# Altium PCB PCB1.PcbDoc
Units mil, origin at the board's own origin, x right, y up, seen from the top; angles counter-clockwise.
Board outline 4672 x 1859 mil, 2 copper layers (Top Layer, Bottom Layer); 85 components, 54 nets, 248 pads, 55 vias.
Unrouted connection lines stored in the file: 3.
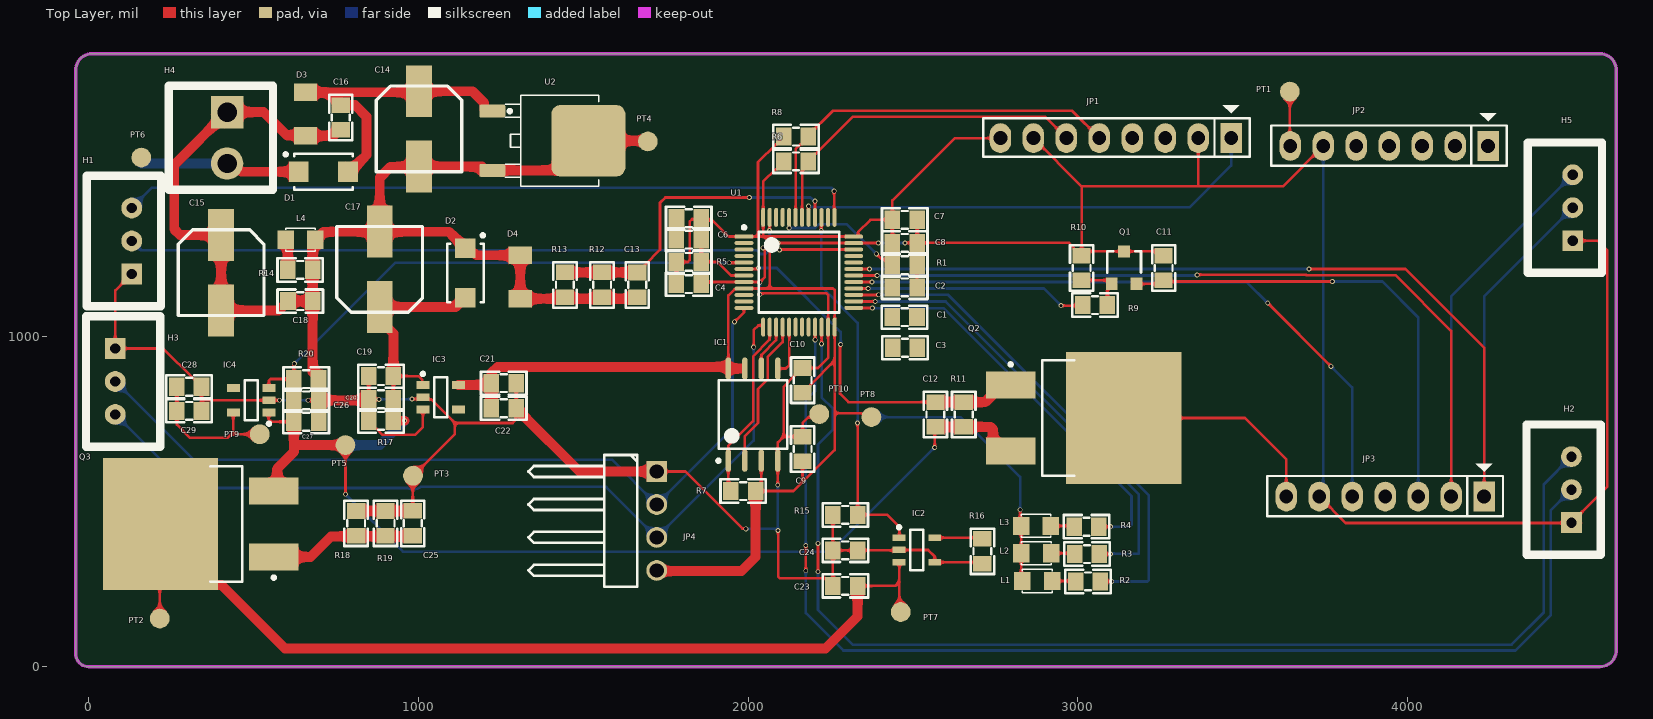
[diagram p0: Top Layer view]
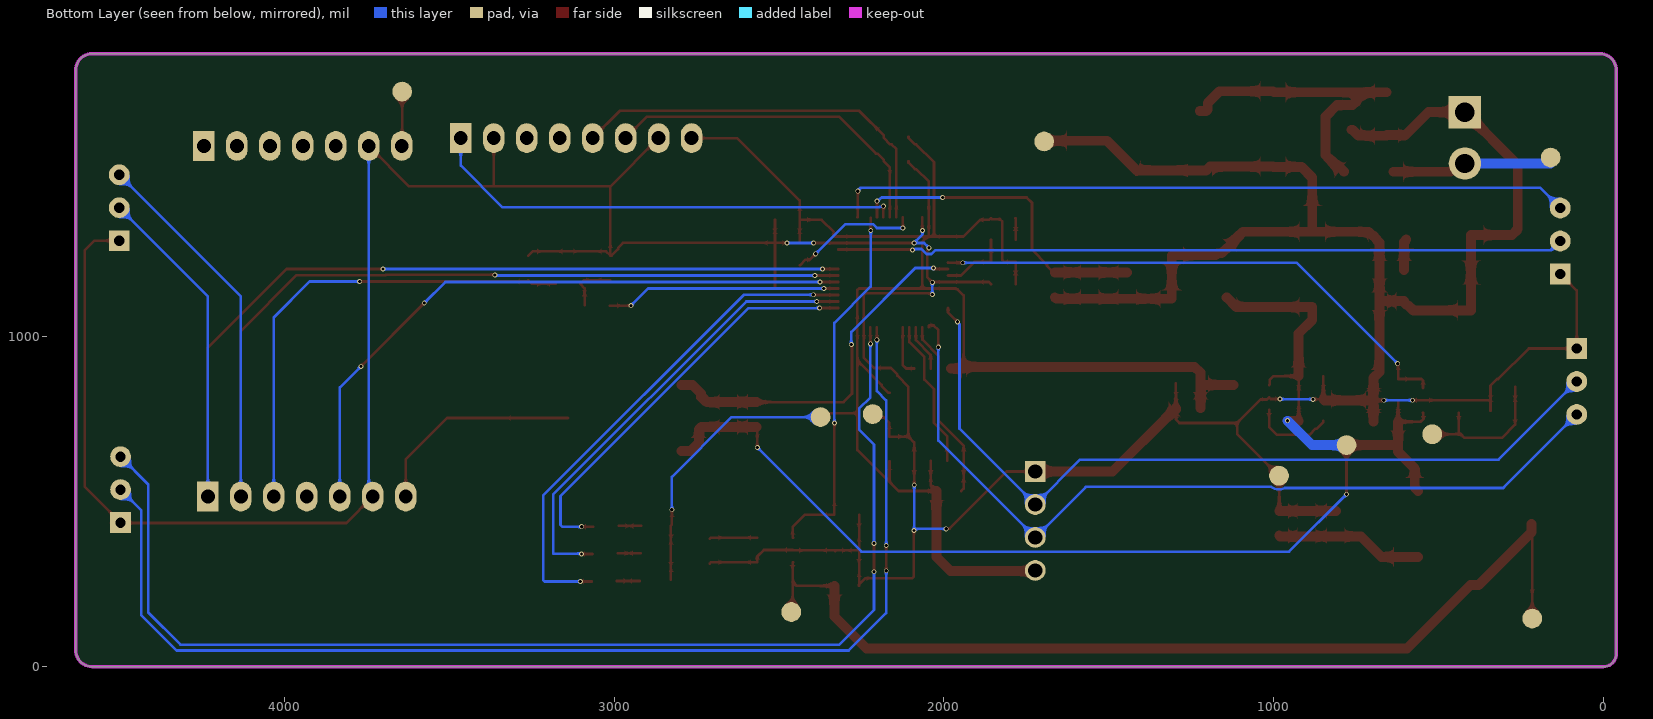
[diagram p1: Bottom Layer view, seen from below]
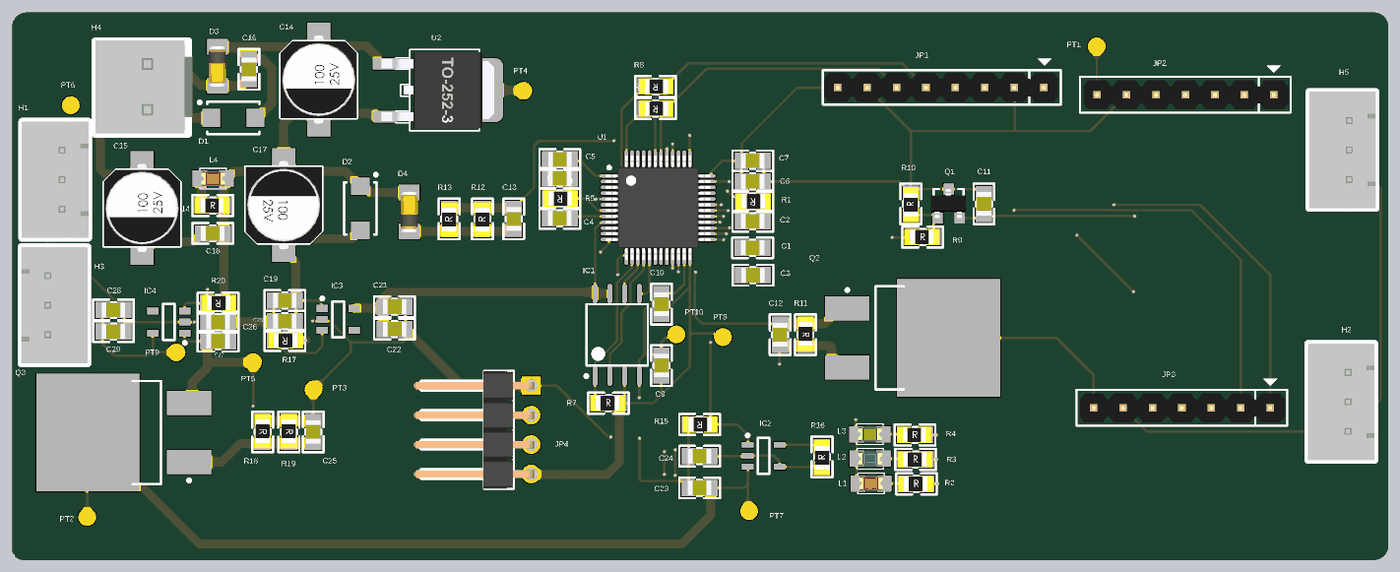
[diagram p2: 3D render of the assembled board from above, using the file's embedded part models]

## Layer stack, top to bottom
Top Solder: solder mask 0.4, Solder Resist, Dk 3.5
Top Layer: signal copper 1.4
Dielectric 1: dielectric 12.6, FR-4, Dk 4.8
Bottom Layer: signal copper 1.4
Bottom Solder: solder mask 0.4, Solder Resist, Dk 3.5

## Board outline
0,0 cw(c0,39) -39,39 -39,1809 cw(c11,1809) 11,1859 4583,1859 cw(c4583,1809) 4633,1809 4633,50 cw(c4583,50) 4583,0

## Design rules (kind name [scope] priority, off if disabled: settings)
Clearance [All] p1: gap=7 ignorepadtopadclearanceinfootprint=FALSE
PolygonConnect [All] p1: connectstyle=Relief reliefconductorwidth=10 reliefentries=4 polygonreliefangle="90 Angle" airgapwidth=10
RoutingVias [All] p1: holewidth=28 width=50 viastyle="Through Hole" minholewidth=10 minwidth=15 maxholewidth=20 maxwidth=30
SolderMaskExpansion via [IsVia] p1: expansion=4 istentingtop=TRUE
SolderMaskExpansion [All] p2: expansion=4 istentingtop=FALSE
Width [All] p1: maxlimit=50 minlimit=8 preferedwidth=30
30 further rules are at their usual default settings.

## Classes and differential pairs
component class LTE,GPS: C11 C12 JP2 JP3 JP4 PT1 Q1 Q2 R9 R10 R11
component class MCU: C1 C2 C3 C4 C5 C6 C7 C8 C9 C10 IC1 JP1 L1 L2 L3 R1 R2 R3 R4 R5 R6 R7 R8 U1
component class "PSU - BUCK, LDO, CHARGER": C13 C14 C15 C16 C17 C18 C19 C20 C21 C22 C25 C26 C27 C28 C29 D1 D2 D3 D4 H1 H2 H3 H4 H5 IC3 IC4 L4 PT2 PT3 PT4 PT5 PT6 PT7 PT8 PT9 PT10 Q3 R12 R13 R14 R17 R18 R19 R20 U2

## Components (designator, comment, footprint, x,y, rotation, side; value= is the part's Value field where it differs from the comment)
C1 "104" "tu 0805" 2475,1060 r180 top
C2 "104" "tu 0805" 2475.23,1150.13 r180 top
C3 "104" "tu 0805" 2476,967 r180 top
C4 "104" "tu 0805" 1820.23,1160.13 r180 top
C5 "104" "tu 0805" 1820.23,1360.13 r0 top
C6 "33pF" "tu 0805" 1820.23,1295.13 r180 top
C7 "104" "tu 0805" 2475.23,1355.13 r180 top
C8 "104" "tu 0805" 2475.23,1285.13 r180 top
C9 "33pF" "tu 0805" 2165.23,660.13 r90 top
C10 "104" "tu 0805" 2165.23,868.72 r270 top
C11 "104" "tu 0805" 3260.23,1209.16 r270 top
C12 "104" "tu 0805" 2568.23,765.07 r270 top
C13 "104" "tu 0805" 1664,1158.13 r270 top
C14 "100uF" "tu nhom 6.3 (d)" 1002,1630.93 r270 top
C15 "100uF" "tu nhom 6.3 (d)" 402,1195 r270 top
C16 "104" "tu 0805" 765,1666 r270 top
C17 "100uF" "tu nhom 6.3 (d)" 883,1205 r90 top
C18 "104" "tu 0805" 642,1109 r0 top
C19 "4.7uF" "tu 0805" 887,881 r180 top
C20 "104" "tu 0805" 887,811 r180 top
C21 "104" "tu 0805" 1259,860 r0 top
C22 "4.7uF" "tu 0805" 1259,784 r0 top
C23 "4.7uF" "tu 0805" 2295,245 r180 top
C24 "4.7uF" "tu 0805" 2295,352.5 r180 top
C25 "104" "tu 0805" 983,434.9 r90 top
C26 "4.7uF" "tu 0805" 660,808 r0 top
C27 "104" "tu 0805" 660,743 r0 top
C28 "104" "tu 0805" 305,849 r0 top
C29 "4.7uF" "tu 0805" 305,776 r0 top
D1 "1N4007" SODFL504X243-2N 712,1501 r0 top
D2 "1N4007" SODFL504X243-2N 1143,1194 r270 top
D3 "12V" "DIODE ZENNER SMD SOD80" 658,1676 r270 top
D4 "5.1V" "DIODE ZENNER SMD SOD80" 1309,1181.72 r90 top
H1 "Header Nạp" XH2.54M-3 131,1191 r90 top
H2 "Header LOG" XH2.54M-3 4497,437 r90 top
H3 "Header GPS" XH2.54M-3 81,965 r270 top
H4 "Header 2P" VH3.96M-2 420,1604 r270 top
H5 "Header LTE" XH2.54M-3 4501,1292 r90 top
IC1 "25Q16BVSIG" SOP127P790X195-8N 2015.23,764.43 r90 top
IC2 "SE9016" SOT95P280X110-5N 2512,354 r0 top
IC3 "TLV70233DBVR" SOT95P280X145-5N 1068,817 r0 top
IC4 "TLV70233DBVR" SOT95P280X145-5N 493,808 r180 top
JP1 "JP8 PIN" JP8 3465.23,1603.13 r180 top value=JP7
JP2 "JP7 PIN" JP7 4244.23,1579.13 r180 top value=JP7
JP3 "JP7 PIN" JP7 4232.21,516.13 r180 top value=JP7
JP4 "JP 1x4 2.54" "JP 1x4 DC" 1623,242 r270 top
L1 "LED 0805" LED-0805-Red 2832,260 r0 top
L2 "LED 0805" LED-0805-Blue 2829,343.94 r0 top
L3 "LED 0805" LED-0805-Green 2828,427 r0 top
L4 "LED 0805" LED-0805-Red 598.06,1295 r0 top
PT1 "PT" "Test pont" 3643,1744 r0 top
PT2 "BAT_IN+" "Test pont" 216,146 r0 top
PT3 "BAT_IN-" "Test pont" 984,579 r0 top
PT4 "PT" "Test pont" 1696,1593 r90 top
PT5 "PT" "Test pont" 779,672 r90 top
PT6 "PT" "Test pont" 160,1544 r90 top
PT7 "PT" "Test pont" 2463,166 r90 top
PT8 "PT" "Test pont" 2374,757 r90 top
PT9 "PT" "Test pont" 519,705 r90 top
PT10 "PT" "Test pont" 2216,766 r90 top
Q1 "HF" SOT23 3140.29,1210.18 r0 top value=C9014
Q2 "IRF9540 DIP" DPAK254P1511X469-3N 2996.23,754.13 r0 top
Q3 "IRF9540 DIP" DPAK254P1511X469-3N 361.77,432.87 r180 top
R1 "10k" "tro smd 0805" 2475.33,1215.13 r180 top
R2 "1k" "tro smd 0805" 3031,261 r0 top
R3 "1k" "tro smd 0805" 3028,344 r0 top
R4 "1k" "tro smd 0805" 3026,427 r0 top
R5 "10k" "tro smd 0805" 1820.33,1225.13 r180 top
R6 "4.7k" "tro smd 0805" 2145.23,1530.13 r180 top
R7 "10k" "tro smd 0805" 1985.23,535.13 r0 top
R8 "4.7k" "tro smd 0805" 2145.23,1605.13 r180 top
R9 "4.7k" "tro smd 0805" 3052,1099 r0 top
R10 "10k" "tro smd 0805" 3009.23,1209.26 r90 top
R11 "220k" "tro smd 0805" 2656.59,764.97 r270 top
R12 "220k" "tro smd 0805" 1555,1158.03 r90 top
R13 "220k" "tro smd 0805" 1442,1158.03 r90 top
R14 "1k" "tro smd 0805" 641.9,1205.97 r0 top
R15 "10k" "tro smd 0805" 2294.9,458 r180 top
R16 "10k" "tro smd 0805" 2708,350 r90 top
R17 "10k" "tro smd 0805" 886.9,743 r180 top
R18 "1k" "tro smd 0805" 814,435 r270 top
R19 "10k" "tro smd 0805" 903,435 r270 top
R20 "10k" "tro smd 0805" 660.1,870 r180 top
U1 "STM32F103xx_LQFP48" STM32_LQPF48 2154.11,1196.25 r0 top
U2 "78M05 SMD TO252" TO252 1370,1595 r270 top

## Footprints (in the part's own frame and the unit in brackets; to place one, negate y for a bottom-side part, rotate by r counter-clockwise, add the part's x,y. Pads: shape width x height; smd on the part's side, far side on the other; paste and mask are expansions set on the pad)
"DIODE ZENNER SMD SOD80" [mm] "SOD80"
  rect 1.35x1.8 smd: 1(1.675,0) 2(-1.675,0)
  body extent -1.75,-0.76 1.75,0.74, height 1.45
DPAK254P1511X469-3N [mm] "D2-PAK, 3-Pads, Body 7.51x8.63mm (max), IPC Medium Density"
  rect 3.81x2.08 smd: 1(-5.08,2.54) 3(-5.08,-2.54)
  rect 8.89x10.16 smd: 2(3.65,0)
  silkscreen extent -5.2,-4.44 -0.2,4.44, body extent -2.65,-5.28 6.16,5.28, height 4.69
JP7 [mil] "JP7"
  rect 65x90 hole 42: 1(0,0)
  oval 65x90 hole 42: 2(100,0) 3(200,0) 4(300,0) 5(400,0) 6(500,0) 7(600,0)
  silkscreen extent -57,-100 658,60, body extent -50,-49 646,49, height 323
JP8 [mil] "JP8"
  rect 65x90 hole 42: 1(0,0)
  oval 65x90 hole 42: 2(100,0) 3(200,0) 4(300,0) 5(400,0) 6(500,0) 7(600,0) 8(700,0)
  silkscreen extent -56,-100 752,57, body extent -48,-50 748,48, height 323
"JP 1x4 DC" [mm] "4 pins, 1 row, right angled, gold plating"
  rect 1.6x1.6 hole 1.1: 1(-8.89,2.54)
  round 1.6 hole 1.1: 2(-6.35,2.54) 3(-3.81,2.54) 4(-1.27,2.54)
  silkscreen extent -10.16,-7.34 0,1.04, body extent -10.16,-7.57 0,2.79, height 2.54
LED-0805-Blue [mil]
  rect 50x55 smd: 1(0,0) 2(90,0)
  silkscreen extent 0,-35 90,35, body extent 5,-25 85,25, height 43
LED-0805-Green [mil]
  rect 50x55 smd: 1(0,0) 2(90,0)
  silkscreen extent 0,-35 90,35, body extent 5,-25 85,25, height 43
LED-0805-Red [mil]
  rect 50x55 smd: 1(0,0) 2(90,0)
  silkscreen extent 0,-35 90,35, body extent 5,-25 85,25, height 43
SODFL504X243-2N [mm] "SODFL, 2-Leads, Body 2.67x5.04mm, IPC Medium Density"
  rect 1.524x1.575 smd: 1(-1.9,0) 2(1.9,0)
  silkscreen extent -3.02,-1.4 2.25,1.46, body extent -2.25,-1.4 2.25,1.4, height 2.43
SOP127P790X195-8N [mm] "SOP, 8-Leads, Body 5.28x5.28mm, Pitch 1.27mm, IPC Medium Density"
  oval 1.7x0.42 smd: 1(-3.55,1.905) 2(-3.55,0.635) 3(-3.55,-0.635) 4(-3.55,-1.905) 5(3.55,-1.905) 6(3.55,-0.635) 7(3.55,0.635) 8(3.55,1.905)
  silkscreen extent -3.67,-2.64 2.64,2.79, body extent -2.7,-2.7 2.7,2.7, height 1.95
SOT23 [mm] "SOT23"
  rect 0.9x0.95 smd: 1(-0.95,-1.25) 2(0,1.25)
  rect 0.9x0.95 smd mask+0: 3(0.95,-1.25)
  silkscreen extent -1.3,-0.38 1.3,1.25, body extent -1.52,-1.23 1.48,1.27, height 1.06
SOT95P280X110-5N [mm] "SOT23, 5-Leads, Body 2.93x2.80mm, Pitch 0.95mm, IPC Medium Density"
  rect 1x0.5 smd: 1(-1.375,0.95) 2(-1.375,0) 3(-1.375,-0.95) 4(1.375,-0.95) 5(1.375,0.95)
  silkscreen extent -1.5,-1.55 0.5,1.87, body extent -0.88,-1.52 0.87,1.53, height 1.1
SOT95P280X145-5N [mm] "SOT23, 5-Leads, Body 2.90x2.80mm, Pitch 0.95mm, IPC Medium Density"
  rect 1x0.6 smd: 1(-1.375,0.95) 2(-1.375,0) 3(-1.375,-0.95) 4(1.375,-0.95) 5(1.375,0.95)
  silkscreen extent -1.5,-1.55 0.5,1.92, body extent -0.88,-1.52 0.87,1.53, height 1.45
STM32_LQPF48 [mm]
  oval 1.45x0.3 smd: 1(-4.225,2.75) 2(-4.225,2.25) 3(-4.225,1.75) 4(-4.225,1.25) 5(-4.225,0.75) 6(-4.225,0.25) 7(-4.225,-0.25) 8(-4.225,-0.75) 9(-4.225,-1.25) 10(-4.225,-1.75) 11(-4.225,-2.25) 12(-4.225,-2.75) 25(4.225,-2.75) 26(4.225,-2.25) 27(4.225,-1.75) 28(4.225,-1.25) 29(4.225,-0.75) 30(4.225,-0.25) 31(4.225,0.25) 32(4.225,0.75) 33(4.225,1.25) 34(4.225,1.75) 35(4.225,2.25) 36(4.225,2.75)
  oval 0.3x1.45 smd: 13(-2.75,-4.225) 14(-2.25,-4.225) 15(-1.75,-4.225) 16(-1.25,-4.225) 17(-0.75,-4.225) 18(-0.25,-4.225) 19(0.25,-4.225) 20(0.75,-4.225) 21(1.25,-4.225) 22(1.75,-4.225) 23(2.25,-4.225) 24(2.75,-4.225) 37(2.75,4.225) 38(2.25,4.225) 39(1.75,4.225) 40(1.25,4.225) 41(0.75,4.225) 42(0.25,4.225) 43(-0.25,4.225) 44(-0.75,4.225) 45(-1.25,4.225) 46(-1.75,4.225) 47(-2.25,4.225) 48(-2.75,4.225)
  silkscreen extent -4.35,-3.1 3.1,3.57, body extent -4.5,-4.5 4.5,4.5, height 1.6
"Test pont" [mil]
  round 60 all layers, no hole: 1(0,0)
TO252 [mm] "TO252"
  round 0.5 on Mech15: 0(0,0)
  rrect25% 1x2 smd: 1(-2.285,-3.7) 3(2.285,-3.7)
  rrect25% 5.5x5.7 smd: 2(0,3.7)
  silkscreen extent -3.5,-2.7 3.5,4.5, body extent -3.3,-3.95 3.3,5.76, height 2.31
"tro smd 0805" [mm]
  rect 1.2x1.4 smd: 1(-0.946,-0.061) 2(0.954,-0.061)
  silkscreen extent -1.75,-0.97 1.75,0.84, body extent -1.56,-0.76 1.44,0.64, height 0.53
"tu 0805" [mm] "Compoment SMD 80x50mil"
  rect 1.2x1.4 smd: 1(-0.946,-0.003) 2(0.954,-0.003)
  silkscreen extent -1.75,-0.89 1.75,0.89, body extent -1.01,-0.64 1.01,0.63, height 0.61
"tu nhom 6.3 (d)" [mm]
  rect 4x2 smd: 1(-2.9,0) 2(2.9,0)
  silkscreen extent -3.3,-3.3 3.3,3.3, body extent -3.8,-3.3 3.8,3.3, height 8
VH3.96M-2 [mm]
  rect 2.5x2.5 hole 1.5: 1(-1.98,0)
  round 2.5 hole 1.5: 2(1.98,0)
  silkscreen extent -4,-4.5 4,3.54, body extent -4.08,-4.49 3.96,3.88, height 10.26
XH2.54M-3 [mm]
  rect 1.6x1.6 hole 0.8: 1(0,0)
  round 1.6 hole 0.8: 2(2.54,0) 3(5.08,0)
  silkscreen extent -2.48,-2.26 7.56,3.46, body extent -2.48,-2.26 7.56,3.48, height 6.91

## Part data
C1 C2 C3 C4 C5 C7 C8 C10 C11 C12 C13 C16 C18 C20 C21 C25 C27 C28: library part "Tu 0805 104 50V 10%", "Dán", Chung_Loai=Dán, Don_Vi=Con, Ma_Hang=MH004551, So_Chan=2, Ten_Linh_Kien="Tụ 0805 104-100nF 10% 50V"
C6 C9: library part "Tu 0805 33pF 50V 10%", "Dán", Chung_Loai=Dán, Don_Vi=Con, Ma_Hang=MH004563, So_Chan=2, Ten_Linh_Kien="Tụ 0805 33p 10% 50V"
C14 C15 C17: library part "Tu Nhom 100uF 25V", "Dán", Chung_Loai=Dán, Don_Vi=Con, Ma_Hang=MH002222, So_Chan=2, Ten_Linh_Kien="Tụ Nhôm 100uF 25V 6x7MM"
C19 C22 C23 C24 C26 C29: library part "Tu 0805 475 25V 20%", "Dán", Chung_Loai=Dán, Don_Vi=Con, Ma_Hang=MH004276, So_Chan=2, Ten_Linh_Kien="Tụ 0805 475-4.7uF 20% 25V"
D1 D2: library part "Diode 1N4007", "Cắm", Chung_Loai=Cắm, Don_Vi=Con, Ma_Hang=MH001063, Ten_Linh_Kien="Diode 1N4007 1A (DIP)"
D3: library part "Diode Zener 12V", "Dán", Chung_Loai=Dán, Don_Vi=Con, Ma_Hang=MH000945, Ten_Linh_Kien="Diode Zener 1/2W 12V SMD1206 ZMM12"
D4: library part "Diode Zener 5.1V", "Dán", Chung_Loai=Dán, Don_Vi=Con, Ma_Hang=MH002881, Ten_Linh_Kien="Diode Zener 1/2W 5.1V SMD1206 ZMM5.1"
H1 H2 H3 H5: library part "Header 3P 2.54 Duc Thang", "Cắm", Chung_Loai=Cắm, Don_Vi=Con, Ma_Hang=MH001292, Ten_Linh_Kien="Header 3P XH2.54-3P Đực Thẳng"
H4: library part "Header 2P VH3.96 Duc Thang", "Cắm", Chung_Loai=Cắm, Don_Vi=Con, Ma_Hang=MH001283, Ten_Linh_Kien="Header 2P XH2.54-2P Đực Thẳng"
JP1: library part JP8
JP2 JP3: library part JP7
JP4: library part "JP 1x4 2.54 Duc Cong", "Cắm", Chung_Loai=Cắm, Don_Vi=Con, Ma_Hang=MH000904, Ten_Linh_Kien="Jump Đơn Đực 2.54MM 1x40P Cong Đứng"
L1 L4: library part "LED 0805 Do", "Dán", Chung_Loai=Dán, Don_Vi=Con, Ma_Hang=MH000897, Ten_Linh_Kien="LED 0805 Màu Đỏ (Red)"
L2: library part "LED 0805 Xanh Duong", "Dán", Chung_Loai=Dán, Don_Vi=Con, Ma_Hang=MH002327, Ten_Linh_Kien="LED 0805 Màu Xanh Dương (Blue)"
L3: library part "LED 0805 Xanh La", "Dán", Chung_Loai=Dán, Don_Vi=Con, Ma_Hang=MH002326, Ten_Linh_Kien="LED 0805 Màu Xanh Lá (Green)"
PT1 PT2 PT3 PT4 PT5 PT6 PT7 PT8 PT9 PT10: library part "test pont"
Q1: library part "C1815 HF SMD", "NPN transistor"
Q2 Q3: "P-Channel Power MOSFET", ComponentLink1Description="Manufacturer Link", ComponentLink1URL=http://www.irf.com/, ComponentLink2Description=Datasheet, ComponentLink2URL=http://www.irf.com/product-info/datasheets/data/irf9540.pdf, DatasheetVersion=PD-9.421C, LatestRevisionDate=17-Jul-2002, LatestRevisionNote="Re-released for DXP Platform.", Note="Pin 2 is electrically connected to pin 4.", PackageDescription="TO, Thru-Hole, Vertical, Heatsink Mounted; 3 In-Line Leads; Pitch 2.54 mm", PackageReference=TO-220AB, PackageVersion=Feb-1997, Published=8-Jun-2000, Publisher="Altium Limited"
R1 R5 R7 R10 R15 R16 R17 R19 R20: library part "Tro 0805 5% 10k", "Dán", Chung_Loai=Dán, Don_Vi=Con, Ma_Hang=MH005239, So_Chan=2, Ten_Linh_Kien="Trở 0805 5% 10k"
R2 R3 R4: library part "Tro 0805 5% 1k", "Dán", Chung_Loai=Dán, Don_Vi=Con, Ma_Hang=MH005234, So_Chan=2, Ten_Linh_Kien="Trở 0805 5% 1k"
R6 R8 R9: library part "Tro 0805 5% 4.7k", "Dán", Chung_Loai=Dán, Don_Vi=Con, Ma_Hang=MH005307, So_Chan=2, Ten_Linh_Kien="Trở 0805 5% 4.7k"
R11 R12 R13: library part "Tro 0805 5% 220k", "Dán", Chung_Loai=Dán, Don_Vi=Con, Ma_Hang=MH005258, So_Chan=2, Ten_Linh_Kien="Trở 0805 5% 220k"
R14 R18: library part "Tro 0805 1% 1k", "Dán", Chung_Loai=Dán, Don_Vi=Con, Ma_Hang=MH005468, So_Chan=2, Ten_Linh_Kien="Trở 0805 1% 1k"
U2: "Dán", Chung_Loai=Dán, Don_Vi=Con, Ma_Hang=MH001917, Ten_Linh_Kien="78M05 TO252"
U1: ComponentLink1Description="Manufacturer Link", ComponentLink1URL=www.st.com/stm32, ComponentLink2Description=Datasheet, ComponentLink2URL=http://www.st.com/stonline/products/literature/ds/13587.pdf, DatasheetVersion="rev6, Mar-2008", PackageDescription="48-Pin Low-Profile Quad Flat Pack, 7 x 7 mm Body, 0.5 mm Pitch (LQFP48)", PackageReference=LQFP48, PackageVersion=Mar-2008, Published=30-May-2008, Publisher="Altium Limited"

## Via types
v1: diameter 15, hole 10, Top Layer to Bottom Layer, tented both sides, 55 vias

## Nets (pads, with @x,y where several pads share a name; then routed paths per layer and width w, separated by ;. In a path a pad name is that pad's centre, name@x,y a point inside that pad or via, vN(x,y) a via of type N, cw(c..) or ccw(c..) an arc to the next point about the centre after c; other vN are vias at no path point)
+5V_DET: C13.1 R12.2 R13.2 U1.40 | length 992.9
  Top Layer w8: C13.1 1667.8,1195.36 1687.43,1214.98 1687.43,1218.92 1733,1264.5 1733,1407 1749,1423 v1(2004,1423) ; v1(2203,1412) 2203,1362.91 U1.40
  Top Layer w30: R13.2 R12.2 1663.62,1195.61 C13.1
  Bottom Layer w8: v1(2004,1423) 2189,1423 2200,1412 v1(2203,1412)
+VIN: D1.1 H4.2 PT6.1 | length 488
  Top Layer w30: H4.2 438.52,1526.05 463.56,1501 D1.1
  Bottom Layer w30: PT6.1@160,1527 160.95,1526.05 H4.2
AD0: C1.1 C2.1 C3.1 C4.1 C7.1 C8.1 C9.2 C10.1 C11.1 C13.2 C14.2 C15.1 C15.2 C16.2 C17.2 C18.1 C18.2 C19.2 C20.2 C21.2 C22.2 C23.2 C24.1 C24.2 C25.2 C26.2 C27.2 C28.2 C29.2 D2.1 D3.1 D4.1 D4.2 H1.1 H2.1 H3.1 H4.1 H5.1 IC1.4 IC2.2 IC2.4 IC3.2 IC4.2 JP1.2 JP1.7 JP2.6 JP3.6 JP4.1 L4.2 PT3.1 PT4.1 PT10.1 Q1.2 R1.1 R10.2 R12.1 R13.1 R14.2 R15.2 R16.1 R18.1 R19.1 R20.1 U1.8 U1.23 U1.35 U1.47 U2.2 U2.3 | length 15795.8
  Top Layer w8: H1.1 81,1141 H3.1 226.44,965 319.02,872.43 322.95,872.43 342.57,852.8 C28.2 342.57,812.37 ; C29.2 342.57,812.37 ; v1(579,808) IC4.2 346.94,808 342.57,812.37 ; v1(666,808) C26.2@697.33,808 ; C27.2 C26.2 ; C19.2 C20.2 849.56,811 v1(881,811) ; v1(981,812) 1008.87,812 IC3.2 1020.53,810.33 1039.67,810.33 1111,739 ; C25.2 983.13,578.13 PT3.1 1111,706 1111,739 ; C21.2 C22.2 1296,783.29 1296,749 1286,739 1111,739 ; JP4.1 1810,592 1982.86,419.14 1992.17,419.14 v1(1993.3,418) ; C4.1 1863.91,1166.72 U1.8 2034.04,1166.72 v1(2035.23,1165.54) 2050.23,1180.54 2050.23,1263.24 2045.23,1268.24 v1(2045.23,1270.13) ; v1(2035.23,1128.54) 2037.12,1128.54 2040.62,1132.04 2238.01,1132.04 2242.69,1127.35 U1.23 2242.69,936.69 2211.94,905.94 2161.16,905.94 2141.54,886.32 2141.54,882.39 2107.8,848.65 2107.8,697.71 ; v1(2065.23,1323.02) 2065.23,1362.29 U1.47 ; v1(2090,551.24) 2090.23,551.47 IC1.4 2090.23,680.13 2107.8,697.71 ; v1(2090.23,1285.13) 2090.53,1284.83 U1.35 2394.93,1284.83 v1(2395.23,1285.13) ; v1(2091,413) 2091,273.38 2095.69,268.69 2237.8,268.69 2257.43,249.07 C23.2 ; PT10.1 2206.3,756.3 2182.3,756.3 2165.36,739.36 C9.2 2107.8,697.71 ; C23.2@2257.32,245.24 R15.2 ; C24.2 2327.47,352.63 2329.85,350.25 C24.1 2456.5,352.63 IC2.2 2546,354 2566.13,333.87 IC2.4 2706.57,316.6 R16.1 ; v1(2475.78,1285.13) 2475.91,1285.27 C8.1 ; C2.1 2512.46,1217.53 C8.1 ; C7.1 C8.1 ; JP1.7 3011.62,1456.74 ; R10.2@3007.68,1246.83 2988.06,1266.46 2988.06,1270.39 2973.19,1285.27 C8.1 ; C11.1 3247.09,1259.39 Q1.2 3024.18,1259.39 R10.2 3011.62,1456.74 ; 3365.23,1459.97 JP1.2 ; JP3.6 3812.34,436 H2.1@4526,436 ; JP2.6 3621.83,1456.74 3365.23,1456.74 3011.62,1456.74 ; H2.1 4606,546 4606,1262 4576,1292 H5.1
  Top Layer w30: C27.2 697.33,743.11 697.33,808 R20.1 697.33,876.33 679.57,894.09 C18.2 ; C26.2 846.16,807.87 C20.2 ; C16.2 760.93,1628.43 742.56,1610.06 D3.1 656.06,1612 600,1612 530.05,1681.95 H4.1 260,1521.95 260,1326.75 277.57,1309.17 C15.1 C15.2 576.73,1080.83 592.21,1096.31 596.15,1096.31 604.77,1104.93 C18.1 C18.2 ; R18.1 811.85,472.47 C25.2 ; C22.2 1296.57,779.93 1305.2,771.31 1309.13,771.31 1488.44,592 JP4.1 ; C13.2 1659.08,1115.77 D4.2 D4.1 1176.58,1247.66 1170.44,1253.8 1158,1253.8 D2.1 1142,1268.8 1127,1283.8 1127,1284.81 1092.63,1319.17 C17.2 ; PT4.1 1694,1595 U2.2 1505.2,1595 1415.24,1505.04 U2.3 1204.65,1505.04 1192.93,1516.76 C14.2 1001.24,1516 916,1516 883,1483 C17.2 ; C18.2 679.57,1203.47 R14.2 679.47,1286.41 L4.2 688.06,1297.5 698.06,1307.5 700.56,1307.5 712.24,1319.17 C17.2
  Bottom Layer w8: v1(579,808) v1(666,808) ; v1(881,811) 980,811 v1(981,812) ; v1(1993.3,418) 2086,418 v1(2091,413) ; v1(2035.23,1128.54) v1(2035.23,1165.54) ; v1(2045.23,1270.13) 2060.23,1285.13 v1(2090.23,1285.13) 2065.23,1310.13 v1(2065.23,1323.02) ; v1@2090,418 v1(2090,551.24) ; v1(2395.23,1285.13) v1(2475.78,1285.13) ; JP3.6@3732.21,544.05 3744.23,556.07 JP2.6
BAT+: C23.1 IC2.3 PT2.1 PT7.1 Q3.2 | length 2965.2
  Top Layer w8: PT2.1 Q3.2@216,407.87 ; C23.1 2446.13,245.13 2459,258 ; IC2.3 2459,315.46 2459,258 ; PT7.1 2459,170 2459,258
  Top Layer w30: Q3.2 218.07,407.87 378.07,247.87 403.07,247.87 595.94,55 2235,55 2332.23,152.23 C23.1
BOOT0: R1.2 U1.44 | length 401
  Top Layer w8: v1(2124.58,1330.42) U1.44 ; v1(2389,1252) 2406.82,1234.18 2420.05,1234.18 R1.2@2437.23,1217
  Bottom Layer w8: v1(2124.58,1330.42) 2203.23,1330.42 2214.34,1341.52 2299.48,1341.52 v1(2389,1252)
CHG_DET: IC2.1 R15.1 U1.39 | length 1123.6
  Top Layer w8: v1(2222,1323.02) 2222,1336.25 2222.28,1336.53 U1.39@2222.28,1361.86 ; v1(2332.13,738.87) R15.1 2422.61,460.39 2459,424 2459,392.54 IC2.1
  Bottom Layer w8: v1@2223,1322.02 v1(2222,1323.02) 2222,1153 2332.13,1042.87 v1(2332.13,738.87)
DET: JP2.1
DTR: JP2.5
EINT: JP2.2
GPIO1: JP3.4
GPS_3V3: C28.1 C29.1 IC4.5 PT9.1 | length 455.5
  Top Layer w8: C28.1 C29.1 267.77,734.23 308,694 421,694 432,705 ; IC4.5 438.87,711.87 432,705 ; PT9.1 432,705
GPS_MCU_RX: H3.3 JP4.3 U1.13 | length 2591
  Top Layer w8: v1(2016.86,969.14) 2016.86,1020.86 2031,1035 2044.08,1035 2045.84,1033.24 U1.13
  Bottom Layer w8: H3.3 301.66,544.34 304,542 966.34,542 ccw(c984,579) 984,538 ccw(c984,579) 1008.33,546 1569,546 1571.34,543.66 JP4.3 2017,686 2017,969 v1(2016.86,969.14) 2017,969.28 v1@2017,970
GPS_MCU_TX: H3.2 JP4.2 U1.12 | length 2518.4
  Top Layer w8: v1(1958.73,1046) 1987.49,1074.77 1987.49,1087.71 U1.12
  Bottom Layer w8: H3.2 318,628 1587,628 JP4.2 1953,722 1953,1038.38 1958.73,1044.11 v1(1958.73,1046) ; H3.2@81,888 H3.2@92.5,876.5
GPS_PWR_EN: IC4.3 R20.2 U1.5 | length 1637.9
  Top Layer w8: IC4.3 547,845.54 547,867.71 551.69,872.39 R20.2 622.53,915.63 624,917.11 v1(624,919) ; v1(1943,1225) 1961.66,1225 1961.71,1225.05 1987.04,1225.05 U1.5
  Bottom Layer w8: v1(624,919) 930,1225 v1(1943,1225)
INT_MPU: JP1.1 U1.41 | length 1452.9
  Top Layer w8: U1.41 v1(2183.64,1396.64)
  Bottom Layer w8: v1(2183.64,1396.64) 2184.98,1395.3 2193.54,1395.3 2195.34,1393.5 3339.5,1393.5 3465.23,1519.23 JP1.1
LED_BLUE: R3.2 U1.26 | length 1403.7
  Top Layer w8: U1.26 v1(2385.67,1107.67) ; R3.2 v1(3099.39,341.61)
  Bottom Layer w8: v1(2385.67,1107.67) 2599.33,1107.67 3185,522 3185,344 3184,343 3105.74,343 3105.68,342.95 v1@3100.73,342.95
LED_DREEN: R4.2 U1.25 | length 1268
  Top Layer w8: U1.25 2376.36,1087.98 v1(2376.82,1087.53) v1@2377.47,1087.53 ; R4.2 v1(3098.61,424.61)
  Bottom Layer w8: v1(2376.82,1087.53) 2592.47,1087.53 3163,517 3163,430 3157,424 v1@3099.21,424
LED_RED: R2.2 U1.27 | length 1551.7
  Top Layer w8: U1.27 v1@2395.35,1127.35 ; R2.2 v1(3102.61,258.61)
  Bottom Layer w8: v1(2396,1128) 2607,1128 3215.61,519.39 3215.61,263.29 3210.92,258.61 v1(3102.61,258.61)
LOG_MCU_RX: H2.3 U1.22 | length 3682.5
  Top Layer w8: v1(2212,288) v1(2212,374) ; v1(2223.01,979.01) U1.22
  Bottom Layer w8: v1(2212,288) 2212,172 2317,67 4315,67 4413,165 4413,553 H2.3 ; v1(2212,374) 2212,674 2257,719 2257,782.98 2223.01,816.97 v1(2223.01,979.01)
LOG_MCU_TX: H2.2 U1.21 | length 3636.3
  Top Layer w8: v1(2175,291) v1(2175,367.5) ; v1(2203.32,991.32) U1.21
  Bottom Layer w8: v1(2175,291) 2175,163 2289,49 4327,49 4434,156 4434,474 H2.2 ; v1(2175,367.5) 2175,808 2203.32,836.32 v1(2203.32,991.32)
LTE_MCU_RX: H5.2 JP3.1 U1.31 | length 3452
  Top Layer w8: U1.31 v1(2368.09,1206.09) ; v1(3701.09,1206.09) 3993.91,1206.09 4232.21,967.79 JP3.1
  Bottom Layer w8: v1(2368.09,1206.09) v1(3701.09,1206.09) v1@3703,1208 ; JP3.1 4232.21,1123.21 H5.2
LTE_MCU_TX: H5.3 JP3.2 U1.30 | length 3514.4
  Top Layer w8: U1.30 v1(2391.59,1186.41) ; v1@3360.59,1187.59 v1(3362,1187.59) 3363.34,1188.93 3368.29,1188.93 3368.36,1189 3692.03,1189 3693.43,1187.59 3963.41,1187.59 4132.21,1018.79 JP3.2
  Bottom Layer w8: v1(2391.59,1186.41) v1@3360.81,1186.41 ; JP3.2 4132.21,1123.21 H5.3
LTE_PCE: JP3.5 U1.29 | length 1974.9
  Top Layer w8: U1.29 v1(2375.72,1166.72) ; v1(3576,1103) v1(3768,911)
  Bottom Layer w8: v1(2375.72,1166.72) 3512.28,1166.72 v1(3576,1103) ; v1(3768,911) 3832.21,846.79 JP3.5
LTE_RESET: R9.1 U1.28 | length 714.3
  Top Layer w8: U1.28 v1(2364.04,1147.04) ; v1(2949,1095) R9.1@3013.17,1095
  Bottom Layer w8: v1(2364.04,1147.04) 2896.96,1147.04 v1(2949,1095)
MCU_3V3: C1.2 C2.2 C3.2 C4.2 C5.2 C7.2 C8.2 C9.1 C10.2 C21.1 C22.1 IC1.3 IC1.7 IC1.8 IC3.5 JP1.8 JP4.4 L1.1 L2.1 L3.1 PT8.1 R5.2 R6.2 R7.2 R8.2 U1.1 U1.9 U1.24 U1.36 U1.48 | length 6282.3
  Top Layer w8: C4.2 1782.76,1160.37 R5.2 1817.62,1227.53 1822.83,1232.74 1822.83,1349.69 1829.91,1356.77 1854.58,1356.77 C5.2 1862.67,1355.13 1890.23,1355.13 1940.84,1304.52 U1.1 2030.23,1304.52 ; IC1.8 1940.23,1126.36 1958.13,1144.26 1961.32,1144.26 1964.1,1147.04 2065.23,1147.04 ; 1979,904.19 IC1.7 ; IC1.3 2040.23,550.17 R7.2 2137.83,532.74 2165.23,560.13 ; R6.2 2107.65,1528.59 2088.03,1508.97 2084.09,1508.97 2045.84,1470.72 U1.48 2045.84,1308.31 2049.63,1304.52 ; R8.2 2107.65,1603.59 2088.03,1583.97 2084.09,1583.97 2030.23,1530.1 2030.23,1304.52 ; C10.2 2169.03,831.14 2188.65,850.76 2188.65,854.7 2262.38,928.43 ; C9.1 2165.23,622.77 2165.23,560.13 ; U1.24@2264.14,1020.27 U1.24@2262.38,1022.03 ; PT8.1 2364.05,766.95 2345.36,766.95 2343.31,769 2262.38,769 ; C8.2 C7.2 ; JP1.8 2627.13,1603.13 2437.65,1413.65 C7.2 ; L3.1@2825,430 v1(2825,476) ; L1.1@2828,264 L3.1 ; 2030.23,1304.52 2049.63,1304.52 ; 2049.63,1304.52 U1.36 2331.91,1304.52 2333.67,1306.28 2333.67,1317.74 2371.2,1355.27 C7.2 ; 2049.63,1304.52 2065.23,1288.92 2065.23,1147.04 ; 2065.23,1147.04 2257.69,1147.04 2262.38,1142.35 U1.24 U1.24@2262.38,1022.03 ; 2165.23,560.13 2262.38,657.28 2262.38,769 ; 2262.38,769 2262.38,928.43 ; 2262.38,928.43 U1.24@2262.38,1022.03
  Top Layer w30: IC3.5 1216.31,854.4 C21.1 ; C22.1 C21.1 ; JP4.4 1725,290 1980,290 2022.8,332.8 R7.2 ; 1979,904.19 IC1.8 1934.99,909.43 1239.8,909.43 1222.23,891.85 1222.23,860.32 C21.1
  Bottom Layer w8: PT8.1 2644,757 2825,576 v1(2825,476)
MCU_RST: C6.1 R5.1 U1.7 | length 215
  Top Layer w8: C6.1 1857.46,1227.63 R5.1 1907.83,1227.53 1948.95,1186.41 U1.7
MCU_SCL: JP1.6 R6.1 U1.42 | length 1045.7
  Top Layer w8: U1.42 2163.95,1514.02 R6.1 2182.46,1536.46 2202.08,1556.09 2206.02,1556.09 2317.93,1668 2900.36,1668 JP1.6
MCU_SDA: JP1.5 R8.1 U1.43 | length 1215
  Top Layer w8: U1.43 2144.27,1569.34 2158.9,1583.97 2162.83,1583.97 2182.46,1603.59 2182.46,1611.46 2256.99,1686 2982.36,1686 JP1.5
MCU_SPI1_CS: IC1.1 R7.1 U1.14 | length 552.3
  Top Layer w8: R7.1 1940.23,540.51 IC1.1 1940.23,670.13 2015.23,745.13 2015.23,941.35 2065.53,991.65 U1.14
MCU_SPI1_MISO: IC1.2 U1.16 | length 452.7
  Top Layer w8: IC1.2 1990.23,698.92 2030.23,738.92 2030.23,841.74 2059.5,871.01 2059.5,939.4 2104.9,984.8 U1.16
MCU_SPI1_MOSI: IC1.5 U1.17 | length 154.6
  Top Layer w8: IC1.5 2114.28,904.19 2125.23,915.13 2125.23,1029.27 U1.17
MCU_SPI1_SCK: IC1.6 U1.15 | length 144.4
  Top Layer w8: IC1.6 2040.23,945.13 2085.23,990.13 U1.15
MCU_SWCLK: H1.3 U1.37 | length 2242.2
  Top Layer w8: v1(2261,1442) 2261,1389.3 2261.65,1388.65 2261.65,1363.32 U1.37
  Bottom Layer w8: H1.3 131,1392 192,1453 2252.31,1453 2257,1448.31 2257,1447.89 2261,1443.89 v1(2261,1442)
MCU_SWDIO: H1.2 U1.34 | length 2213.8
  Top Layer w8: v1(2095.07,1263.67) 2096.97,1263.67 2098.44,1265.15 U1.34
  Bottom Layer w8: H1.2 159,1263 2026.2,1263 2037.57,1251.63 2052.89,1251.63 2067.89,1266.63 2087.16,1266.63 2088.78,1265.01 2093.73,1265.01 v1(2095.07,1263.67)
NetC5_1: C5.1 C6.2 | length 64.9
  Top Layer w8: C6.2 1782.65,1359.65 C5.1
NetC14_1: C14.1 C16.1 D1.2 D3.2 U2.1 | length 947.8
  Top Layer w30: D3.2 726.15,1741.94 ; D1.2 786.8,1502 801.8,1517 808,1517 843,1552 843,1668 808,1703 765.09,1703 C16.1 760.93,1703.23 752.31,1711.85 752.31,1715.79 726.15,1741.94 ; U2.1 1204.65,1684.96 1199.96,1689.65 1199.96,1709.33 1164.19,1745.11 C14.1 998.84,1741.94 726.15,1741.94
NetC25_1: C25.1 Q3.1 R18.2 R19.2 | length 448.2
  Top Layer w30: Q3.1 672.87,332.87 735,395 980.46,395 C25.1
NetIC2_5: IC2.5 R16.2 | length 145.8
  Top Layer w8: IC2.5 2706.57,391.4 R16.2
NetIC3_3: IC3.3 R17.2 | length 247
  Top Layer w8: R17.2 849.32,741.46 868.94,721.83 872.88,721.83 891.72,703 990,703 1013.87,726.87 IC3.3
NetL1_2: L1.2 R2.1 | length 70.4
  Top Layer w8: L1.2 R2.1@2992.38,260
NetL2_2: L2.2 R3.1 | length 69.4
  Top Layer w8: L2.2 R3.1@2988.44,343.94
NetL3_2: L3.2 R4.1 | length 68.4
  Top Layer w8: L3.2 R4.1@2986.38,427
NetL4_1: L4.1 R14.1 | length 94.2
  Top Layer w30: L4.1 604.67,1288.39 R14.1
NetQ1_1: Q1.1 R9.2 R10.1 | length 165.7
  Top Layer w8: R10.1 3091.83,1172.03 Q1.1 3089.57,1147.65 R9.2
R_GIO0: JP2.3
RESET: C11.2 JP3.3 Q1.3 | length 1443.8
  Top Layer w8: Q1.3 3249.48,1160.97 C11.2 ; C11.2@3263.68,1168 v1(3772,1168)
  Bottom Layer w8: v1(3772,1168) 3924,1168 4032.21,1059.79 JP3.3
RI: JP2.4
SIM_DET: U1.38
SIM_PWR_EN: C12.1 Q2.1 R11.1 U1.6 | length 1118.7
  Top Layer w8: U1.6 2026.93,1206.09 v1@2029.83,1209 ; v1@2280.88,977.12 v1(2280.88,977) 2279.54,975.66 2279.54,970.71 2279,970.17 2279,828 2304.7,802.3 C12.1
  Top Layer w30: C12.1 2718.65,802.3 2736.23,819.87 2736.23,828.19 2762.17,854.13 Q2.1
  Bottom Layer w8: v1@2031.73,1205.27 v1(2031.73,1209) 2087,1209 2280.88,1015.12 v1(2280.88,977)
VBAT: C12.2 C17.1 C19.1 C20.1 C26.1 C27.1 D2.2 IC3.1 IC4.1 PT5.1 Q2.3 Q3.3 R11.2 R17.1 | length 4024.4
  Top Layer w8: IC4.1 546,769.46 546,751 554.13,742.87 C27.1 C26.1 ; v1(779,523) PT5.1 ; R17.1 924.13,881.03 C19.1 999.87,881.13 1012,869 1012,856.27 IC3.1 ; v1(2566,665) C12.2@2566,725.4
  Top Layer w30: Q3.3 572.24,543.33 572.24,601.24 622.77,651.77 622.77,672 ; C27.1 622.77,672 ; PT5.1 622.77,672 ; R17.1 924.73,746 v1(958,746) ; C19.1 924.23,1010.23 883,1051.46 C17.1 1113.63,1090.83 1142,1119.2 D2.2 ; C12.2 2735.5,727.5 2742.75,720.25 2742.75,680.08 2768.7,654.13 Q2.3
  Bottom Layer w8: v1(779,523) 953,349 2250,349 v1(2566,665)
  Bottom Layer w30: PT5.1 884,672 v1(958,746)
VBAT_SIM: JP2.7 PT1.1 | length 165.4
  Top Layer w8: PT1.1 3643,1580.36 JP2.7
VIN_SIM: JP3.7 Q2.2 | length 656.9
  Top Layer w8: Q2.2 3506.87,754.13 3632.21,628.79 JP3.7
XCL: JP1.3
XDA: JP1.4
pads on no net: IC3.4 IC4.4 U1.2 U1.3 U1.4 U1.10 U1.11 U1.18 U1.19 U1.20 U1.32 U1.33 U1.45 U1.46 U2.0

## Keep-outs
Keep-Out Layer:
  the board outline again, w10